# EAGLE board schematic-version2 - Jigbin (EAGLE 8.6.0)
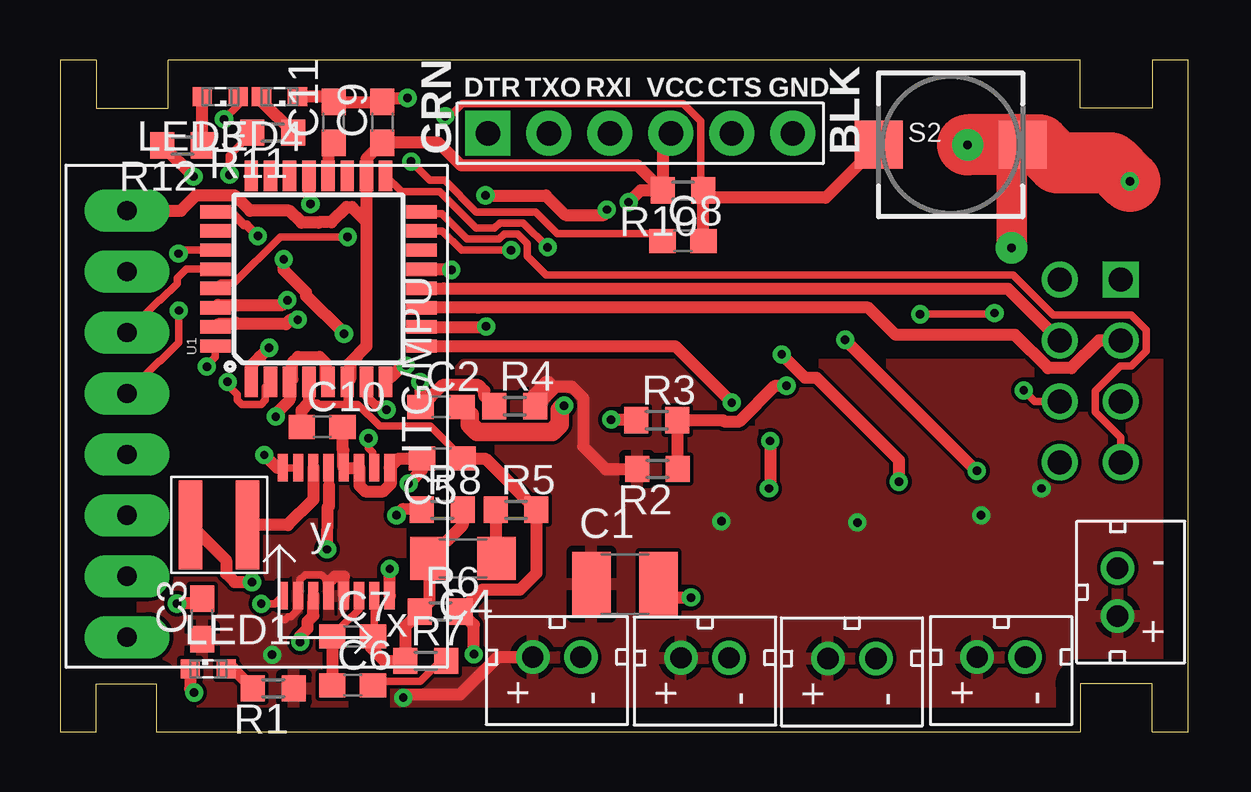
[diagram p0: board, top side]
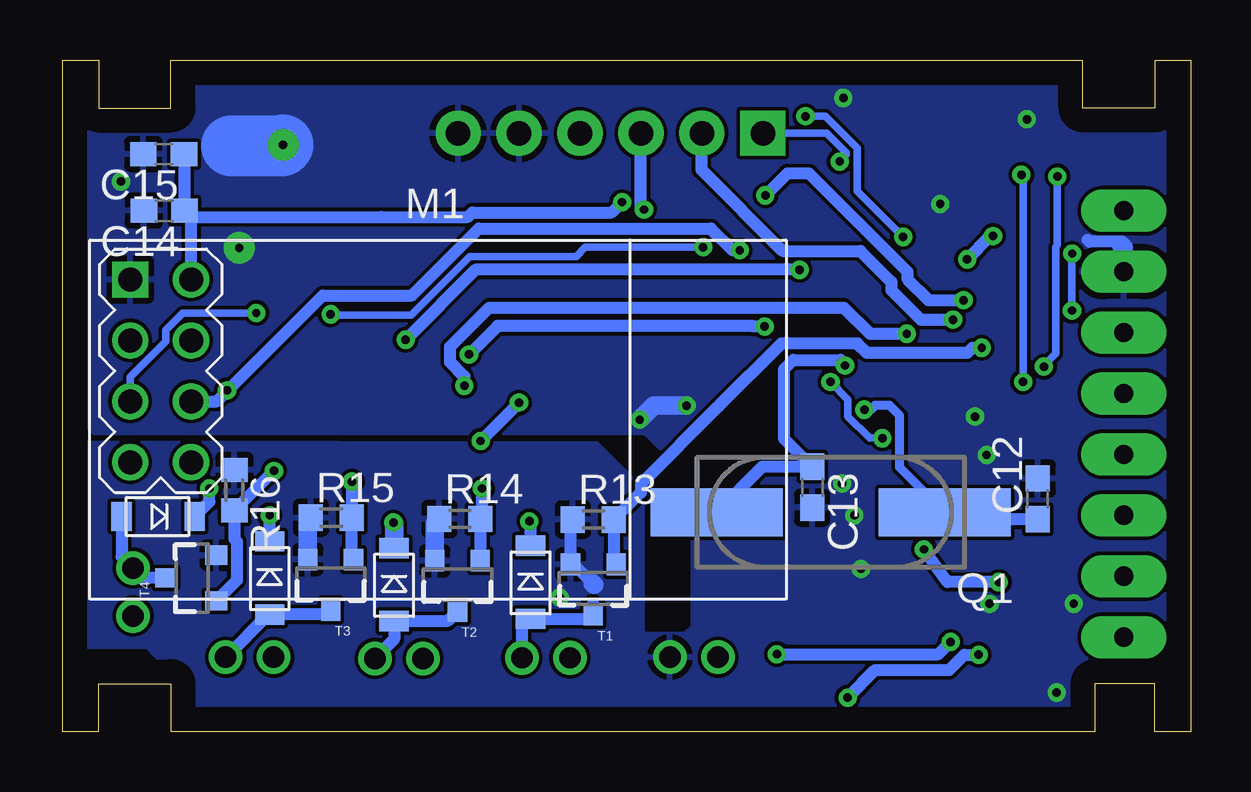
[diagram p1: board, bottom side, seen from below]

Size 47 x 28 mm. Coordinates in mm from the lower left corner, seen from the top.
Outline: 0,0 1.5,0 1.5,2 4,2 4,0 42.5,0 42.5,2 45.5,2 45.5,0 47,0 47,28 45.5,28 45.5,26 42.5,26 42.5,28 4.5,28 4.5,26 1.5,26 1.5,28 0,28 0,0
Copper layers (1*16): Top 0.035mm / dielectric 1.5mm / Bottom 0.035mm
Design rules "default": minimum track width 6mil, minimum drill 0.35mm, track to track 6mil, track to pad 6mil, pad to pad 6mil, via to via 6mil, smd to smd 6mil, copper to edge 40mil, drill to drill 6mil, minimum pad ring 10mil, minimum via ring 8mil, stop-mask expansion 4mil, vias tented up to drill 0mil, thermal gap 10mil

## Footprints (pad centres in the part's own frame; a part is rotated, then mirrored left to right if it is on the bottom)
C1210 = smd 1.6 x 2.7: 1 -1.4,0; 2 1.4,0
C0603 = smd 1.1 x 1: 1 -0.85,0; 2 0.85,0
C1206 = smd 1.6 x 1.8: 1 -1.4,0; 2 1.4,0
MINI2-F3-B = smd 1.22 x 0.85: NEG 0,1.55; POS 0,-1.5
FTDI_DEVICE_SIDE = drill 1.016 pad 1.88 square: P$1 -6.35,0 | drill 1.016 pad 1.88: P$2 -3.81,0; P$3 -1.27,0; P$4 1.27,0; P$5 3.81,0; P$6 6.35,0
XAL4020 = smd 0.98 x 3.7: 1 -1.185,0; 2 1.185,0
SML0603 = smd 0.8 x 0.8: A 0.75,0; C -0.75,0
WIRELESS-NRF24L01 = drill 1 square: 1 -12.7,6.35 | drill 1: 2 -10.16,6.35; 3 -12.7,3.81; 4 -10.16,3.81; 5 -12.7,1.27; 6 -10.16,1.27; 7 -12.7,-1.27; 8 -10.16,-1.27
CSM-7X-DU = smd 5.5 x 2: 1 -4.75,0; 2 4.75,0
R0603 = smd 1 x 1.1: 1 -0.85,0; 2 0.85,0
PUSHBUTTON_SMD_SJ = smd 2 x 2: P$1 3,0; P$2 -3,0
SOT23-3 = smd 0.8 x 0.9: 1 -0.95,-1; 2 0.95,-1; 3 0,1.1
TQFP32-08 = smd 1.27 x 0.559: 1 -4.293,2.8; 2 -4.293,2; 3 -4.293,1.2; 4 -4.293,0.4; 5 -4.293,-0.4; 6 -4.293,-1.2; 7 -4.293,-2; 8 -4.293,-2.8; 17 4.293,-2.8; 18 4.293,-2; 19 4.293,-1.2; 20 4.293,-0.4; 21 4.293,0.4; 22 4.293,1.2; 23 4.293,2; 24 4.293,2.8 | smd 0.559 x 1.27: 9 -2.8,-4.293; 10 -2,-4.293; 11 -1.2,-4.293; 12 -0.4,-4.293; 13 0.4,-4.293; 14 1.2,-4.293; 15 2,-4.293; 16 2.8,-4.293; 25 2.8,4.293; 26 2,4.293; 27 1.2,4.293; 28 0.4,4.293; 29 -0.4,4.293; 30 -1.2,4.293; 31 -2,4.293; 32 -2.8,4.293
GY-521 = drill 0.8 pad 1.778 long: ADO -8.89,-6.35; GND -8.89,6.35; INT -8.89,-8.89; SCL -8.89,3.81; SDA -8.89,1.27; VCC -8.89,8.89; XCL -8.89,-3.81; XDA -8.89,-1.27
JST_CONNECTOR_FEMALE = drill 0.889: + 0,1; - 0,-1
SSOP-16GN = smd 0.419 x 1.143: 1 -2.223,-2.667; 2 -1.587,-2.667; 3 -0.953,-2.667; 4 -0.318,-2.667; 5 0.318,-2.667; 6 0.953,-2.667; 7 1.587,-2.667; 8 2.223,-2.667; 9 2.223,2.667; 10 1.587,2.667; 11 0.953,2.667; 12 0.318,2.667; 13 -0.318,2.667; 14 -0.953,2.667; 15 -1.587,2.667; 16 -2.223,2.667

## Placement (x,y rotation side)
C1  100uF  [C1210]  23.55,6.15 0 top
C2  0.056uF  [C0603]  15.88,13.54 0 top
C3  10uF  [C0603]  5.92,4.7 90 top
C4  65pF  [C1206]  16.79,7.21 180 top
C5  22uF  [C0603]  15.93,11.38 180 top
C6  470pF  [C0603]  12.19,1.93 0 top
C7  10pF  [C0603]  12.19,3.96 0 top
C8  0.1uF  [C0603]  25.96,20.45 0 top
C9  0.1uF  [C0603]  13.44,25.4 90 top
C10  0.1uF  [C0603]  10.92,12.7 0 top
C11  0.1uF  [C0603]  11.4,25.4 90 top
C12  27pF  [C0603]  6.38,9.7 90 bottom
C13  27pF  [C0603]  15.77,10.19 270 bottom
C14  10uF  [C0603]  42.77,21.72 180 bottom
C15  0.1uF  [C0603]  42.8,24.08 180 bottom
D1  DB2W40300L  [MINI2-F3-B]  27.51,6.2 0 bottom
D2  DB2W40300L  [MINI2-F3-B]  33.2,6.1 0 bottom
D3  DB2W40300L  [MINI2-F3-B]  38.38,6.38 0 bottom
D4  DB2W40300L  [MINI2-F3-B]  43.05,8.97 270 bottom
J2  FTDI_DEVICE  [FTDI_DEVICE_SIDE]  24.18,24.94 0 top
L1  3.3uH  [XAL4020]  6.63,8.61 0 top
LED1  RED  [SML0603]  6.17,2.62 0 top
LED3  YELLOW  [SML0603]  6.68,26.47 180 top
LED4  YELLOW  [SML0603]  9.14,26.47 180 top
M1  WIRELESS-NRF24L01  [WIRELESS-NRF24L01]  31.5,12.5 0 bottom
Q1  8MHz  [CSM-7X-DU]  15.01,9.14 180 bottom
R1  820  [R0603]  8.89,1.8 180 top
R2  10K  [R0603]  24.89,10.95 180 top
R3  10K  [R0603]  24.87,12.98 0 top
R4  200K  [R0603]  18.95,13.56 0 top
R5  10K  [R0603]  19,9.25 0 top
R6  374K  [R0603]  15.85,5 0 top
R7  15K  [R0603]  15.24,2.95 0 top
R8  162K  [R0603]  15.93,9.25 0 top
R10  10K  [R0603]  25.96,22.56 180 top
R11  820  [R0603]  8.86,24.97 180 top
R12  820  [R0603]  5.11,24.43 180 top
R13  10K  [R0603]  24.89,8.84 0 bottom
R14  10K  [R0603]  30.45,8.86 0 bottom
R15  10K  [R0603]  35.81,8.92 0 bottom
R16  10K  [R0603]  39.85,10.06 270 bottom
S2  PUSH_BUTTON  [PUSHBUTTON_SMD_SJ]  37.11,24.46 0 top
T1  NMOS  [SOT23-3]  24.89,5.97 180 bottom
T2  NMOS  [SOT23-3]  30.56,6.12 180 bottom
T3  NMOS  [SOT23-3]  35.84,6.17 180 bottom
T4  NMOS  [SOT23-3]  41.61,6.4 90 bottom
U1  ATMEGA328P_TQFP  [TQFP32-08]  10.77,18.87 90 top
U2  GY-521MPU6050  [GY-521]  11.68,12.83 0 top
U$1  JST_CONNECTOR_FEMALE  [JST_CONNECTOR_FEMALE]  20.7,3.1 90 top
U$2  LTC3534  [SSOP-16GN]  11.51,8.33 180 top
U$4  JST_CONNECTOR_FEMALE  [JST_CONNECTOR_FEMALE]  26.87,3.07 90 top
U$7  JST_CONNECTOR_FEMALE  [JST_CONNECTOR_FEMALE]  32.99,3.05 90 top
U$10  JST_CONNECTOR_FEMALE  [JST_CONNECTOR_FEMALE]  39.22,3.1 90 top
U$13  JST_CONNECTOR_FEMALE  [JST_CONNECTOR_FEMALE]  44.07,5.82 180 top

## Library data of the parts
C1 C4 C8-C11 = rcl; SPICEPREFIX: C
C2 C3 C5-C7 C12-C15 R2-R8 R10 R13-R16 = resistor
D1-D4 J2 M1 U2 U$1 U$4 U$7 U$10 U$13 = quad
L1 = coilcraft
LED1 LED3 LED4 = led
Q1 = crystal; OC_FARNELL: unknown; OC_NEWARK: unknown
R1 R11 R12 = rcl; SPICEPREFIX: R
S2 = adafruit
T1-T4 = quad; DATASHEET: http://www.mouser.com/ds/2/196/irlml6244pbf-936666.pdf; MOUSER: 942-IRLML6244TRPBF; URL: http://www.mouser.com/Search/ProductDetail.aspx?R=IRLML6244TRPBFvirtualkey57370000virtualkey942-IRLML6244TRPBF
U1 = quad; PROD_ID: IC-09069
U$2 = LTC3534

## Nets
CE: M1.3 U1.11
CSN: M1.4 U1.12
DEBUG_LED1: R12.2 U1.32
DEBUG_LED2: R11.2 U1.2
DTR: C8.1 J2.P$1
GND: C1.2 C2.2 C3.2 C5.2 C9.2 C10.2 C11.2 C12.2 C13.2 C14.2 C15.2 J2.P$5 J2.P$6 LED1.C LED3.C LED4.C M1.1 R3.1 R8.1 R13.1 R14.1 R15.1 R16.1 S2.P$1 T1.2 T2.2 T3.2 T4.2 U1.3 U1.5 U1.21 U2.GND U$1.- U$2.1 U$2.3 U$2.4 U$2.7 U$2.8 U$2.9 U$2.16
MISO: M1.7 U1.16
MOSI: M1.6 U1.15
N$1: C12.1 Q1.1 U1.7
N$2: C8.2 R10.1 S2.P$2 U1.29
N$3: D1.POS T1.3 U$4.-
N$4: C13.1 Q1.2 U1.8
N$5: D2.POS T2.3 U$7.-
N$6: D3.POS T3.3 U$10.-
N$7: D4.POS T4.3 U$13.-
N$8: L1.1 U$2.5
N$9: L1.2 U$2.6
N$10: LED1.A R1.2
N$12: LED3.A R12.1
N$13: LED4.A R11.1
N$14: C4.1 R5.1
N$16: C2.1 R4.1 U$2.2
N$18: C4.2 C7.2 R6.1 R7.1 R8.2 U$2.15
N$19: C6.1 C7.1 U$2.14
N$20: C6.2 R7.2
N$25: C11.1 U1.20
PWM1: R13.2 T1.1 U1.1
PWM2: R14.2 T2.1 U1.9
PWM3: R15.2 T3.1 U1.10
PWM4: R16.2 T4.1 U1.13
PWR: C1.1 C3.1 D1.NEG D2.NEG D3.NEG D4.NEG R1.1 R2.2 R4.2 U$1.+ U$2.10 U$2.12 U$2.13 U$4.+ U$7.+ U$10.+ U$13.+
RXD: J2.P$3 U1.30
SCK: M1.5 U1.17
SCL: U1.28 U2.SCL
SDA: U1.27 U2.SDA
TXD: J2.P$2 U1.31
V_BAT: R2.1 R3.2 U1.25
V_REG_OUT: C5.1 C9.1 C10.1 C14.1 C15.1 J2.P$4 M1.2 R5.2 R6.2 R10.2 U1.4 U1.6 U1.18 U2.VCC U$2.11

## Tracks (layer width: path | path; a pad name or v marks a point on that pad's centre or on a via)
CE
  Top 0.508: M1.3 43.3,16.31 42.14,15.15 41.17,15.15 39.79,16.54 34.82,16.54 33.68,17.68 17.43,17.68 17.43,17.67 15.29,17.67 | 15.29,17.68 15.29,17.67 | 15.29,17.67 U1.11
CSN
  Top 0.508: U1.12 15.98,18.47 39.49,18.47 M1.4
DEBUG_LED1  (via drill 0.35)
  Top 0.305: U1.32 6.48,15.62 6.12,15.27 v6.12,15.21
  Top 0.508: v5.56,23.14 R12.2
  Bottom 0.305: v5.56,23.14 5.56,20.27 5.64,20.2 5.64,15.75 6.12,15.27 v6.12,15.21
DEBUG_LED2  (via drill 0.35)
  Top 0.305: U1.2 8.55,14.36 8.55,13.82 8.38,13.64 7.56,13.64 7.38,13.82 7.38,14.05 6.99,14.45 v6.99,14.58 | v7.06,23.22 7.06,24.02 R11.2
  Bottom 0.305: v6.99,14.58 6.99,21.54 6.99,23.14 v7.06,23.22
DTR  (via drill 0.35)
  Top 0.305: C8.1 24.8,20.75 20.73,20.75 19.82,21.66 17.35,21.66 16.03,22.99 15.41,22.99 v14.63,23.77
  Bottom 0.305: v14.63,23.77 14.35,24.04 14.35,24.13 15.16,24.94 J2.P$1
GND  (via drill 0.35, 0.35 pad 1.3)
  Top 0.305: U$2.9 8.95,5.33 v8.39,5.33 | LED3.C 7.43,26.12 v6.83,25.53 | U$2.8 U$2.7
  Top 0.508: U$2.8 9.04,11 v8.51,11.53 | C10.2 11.77,11.77 11.8,11.74 11.8,11.02 U$2.4 U$2.3 12.48,10.98 12.48,10.26 12.72,10.02 13.47,10.02 13.77,10.32 13.77,11 U$2.1 14.11,11.38 C5.2 15.08,10.91 v14.53,10.34 | R8.1 14.28,9.27 v14.02,9.02 | U$2.16 13.74,5.68 v13.74,6.78 | C3.2 5.7,5.33 v4.88,5.33 | LED1.C 5.42,1.79 v5.59,1.63 | R3.1 23.04,12.98 v22.96,13.01 | LED4.C 11.19,26.47 C11.2 C9.2 13.6,26.42 v14.48,26.42 | U1.21 10.37,22.03 v10.44,22 | v8.99,13.13 9.12,13.26 9.12,13.37 9.57,13.82 U1.3 9.68,14.69 9.68,15.38 9.92,15.62 10.82,15.62 11.05,15.38 11.05,14.69 U1.5 | C1.2 25.5,5.59 v26.29,5.59
  Top 0.762: v21.01,13.59 20.83,13.41 20.83,12.79 20.52,12.48 17.38,12.48 17.07,12.79 17.07,13.2 C2.2
  Top 1.27: S2.P$1 39.65,24 v39.65,20.17
  Top 1.524: S2.P$1 39.95,24.3
  Top 2.54: v37.82,24.46 S2.P$1 40.81,24.46 41.55,23.71 43.8,23.71 v44.58,22.94
  Bottom 0.508: R13.1 25.84,8.74 T1.2 25.71,6.97 24.92,6.17 | 2.92,20.3 3.05,20.42 4.22,20.42 4.31,20.51
  Bottom 0.762: T2.2 31.51,8.66 R14.1 | T3.2 36.79,8.79 R15.1 | 24.92,6.17 24.87,6.12 | U2.GND 2.79,20.17 2.92,20.3 | v21.01,13.59 22.38,13.59 v22.96,13.01
  Bottom 2.54: v37.82,24.46 37.87,24.41 39.98,24.41
  pour Bottom: 0.33,25.68 4.6,25.68 4.85,25.93 4.85,27.66 41.99,27.66 42.09,27.56 42.16,27.48 42.16,25.45 42.39,25.22 46.71,25.22 46.71,13.41 45.72,12.42 22.76,12.42 21.16,10.82 20.78,10.44 20.78,4.39 21.08,4.09 22.83,4.09 22.83,1.19 22.63,0.99 4.85,0.99 4.85,1.65 4.09,2.41 3.89,2.62 0.43,2.62 0.23,2.82 0.33,2.92
  pour Bottom: 24.74,12.04 22.81,10.11 22.81,0.86 41.4,0.86 41.4,1.4 43.21,3.2 43.51,3.51 46.69,3.51 46.69,11.96 46.46,11.96 46.35,12.06
MISO
  Top 0.305: U1.16 15.14,21.59 15.9,21.59 16.97,20.52 18.29,20.52 18.51,20.75 19.08,20.75 19.48,20.35 19.48,19.82 20.27,19.03 39.73,19.03 41.39,17.37 44.63,17.37 45.26,16.75 45.26,15.87 44.63,15.25 44.18,15.25 43.14,14.21 43.14,13.33 44.2,12.27 M1.7
MOSI  (via drill 0.35)
  Top 0.305: M1.6 40.62,13.77 v40.16,14.22 | U1.15 15.93,20.87 16.74,20.07 v18.8,20.07
  Bottom 0.508: v18.8,20.07 19.08,20.07 20,20.98 29.66,20.98 32.46,18.18 36.16,18.18 40.58,13.77 M1.6
N$1  (via drill 0.35)
  Top 0.381: v13.6,13.41 13.41,13.6 13.15,13.6 12.77,13.98 U1.7
  Bottom 0.381: Q1.1 12.13,11.01 12.13,13.18 12.55,13.6 13.15,13.6 13.34,13.41 v13.6,13.41
  Bottom 0.508: C12.1 9.97,8.85 Q1.1
N$2  (via drill 0.35)
  Top 0.305: C8.2 26.72,21.4 26.72,22.68 | U1.29 6.69,18.69 7.24,18.69 9.18,20.62 v11.98,20.62 | v16.05,25.65 16.23,25.65 16.77,26.19 25.97,26.19 26.7,25.46 26.7,22.67 R10.1
  Top 0.508: C8.2 R10.1 | 26.72,22.68 27.15,22.25 31.9,22.25 S2.P$2
  Bottom 0.305: v11.98,20.62 13.89,22.53 13.89,24.18 13.89,24.32 15.23,25.65 v16.05,25.65
N$3
  Bottom 0.508: U$4.- 27.87,4.33 D1.POS 25.06,4.7 T1.3 24.89,5.31 24.92,5.33
N$4  (via drill 0.35)
  Top 0.508: v14.41,15.26 14.3,15.26 U1.8
  Bottom 0.508: Q1.2 17.87,11.04 C13.1 16.94,12.2 16.94,15.11 16.56,15.49 14.59,15.49 v14.41,15.26
N$5
  Bottom 0.508: T2.3 30.98,4.6 D2.POS 33.2,3.85 U$7.-
N$6
  Bottom 0.508: T3.3 36.04,4.88 D3.POS 38.44,4.88 U$10.-
N$7
  Bottom 0.508: T4.3 43.65,6.4 U$13.- 44.55,7.3 D4.POS
N$8  (via drill 0.35)
  Top 0.305: 11.21,10.25 11.21,10.97 U$2.5 11.17,10.98
  Top 0.508: L1.1 6.92,7.14 6.92,6.59 7.28,6.23 v8,6.23 | v11.12,7.59 11.15,9.33 11.21,9.39 11.21,10.25
  Bottom 0.508: v8,6.23 10.14,6.23 v11.12,7.59
N$9
  Top 0.508: L1.2 9.5,8.61 10.55,9.66 U$2.6
N$10
  Top 0.508: R1.2 7.23,2.62 LED1.A
N$12
  Top 0.508: R12.1 5.93,24.46 LED3.A
N$13
  Top 0.508: R11.1 8.39,26.29 LED4.A
N$14
  Top 0.508: R5.1 18.15,7.25 C4.1
N$16  (via drill 0.35)
  Top 0.305: 15.87,14.5 15.93,14.45 | C2.1 14.86,13.7 | v12.85,12.23 12.85,11.82 13.04,11.63 13.04,11.05 U$2.2
  Top 0.508: R4.1 17.68,13.98 17.68,14.21 17.44,14.45 15.93,14.45 C2.1 15.03,14.59 v15.01,14.58
  Bottom 0.305: v15.01,14.58 14.28,13.85 14.28,13.13 13.38,12.23 v12.85,12.23
N$18
  Top 0.305: U$2.15 13.09,4.04 C7.2
  Top 0.508: 13.54,2.92 R7.1 14.39,4.39 R6.1 15.39,5.39 C4.2 16.78,8.6 R8.2 | 13.54,2.92 13.54,2.9 | 13.54,2.92 12.97,3.49 C7.2
N$19
  Top 0.305: C7.1 12.14,4.79 12.16,4.79 12.46,5.09 U$2.14
  Top 0.508: C7.1 C6.1
N$20
  Top 0.305: R7.2 15.87,2.95 15.02,2.09 13.2,2.09 C6.2
N$25
  Top 0.508: C11.1 11.17,24.32 U1.20
PWM1  (via drill 0.35)
  Top 0.508: 8.33,15.62 8.36,15.62 | U1.1 7.97,15.27 8.32,15.62 8.33,15.62 | v8.71,16 8.33,15.62
  Bottom 0.508: T1.1 24.04,7.07 R13.2 22.92,9.96 22.92,10.31 19.66,13.57 17.05,16.18 13.89,16.18 13.51,15.8 9.3,15.8 9.09,16 v8.71,16
PWM2  (via drill 0.35)
  Top 0.508: v29.59,12.12 29.59,10.19 v29.54,10.13 | v27.99,13.72 25.64,16.07 U1.9
  Bottom 0.508: T2.1 R14.2 29.54,8.93 v29.54,10.13 | v29.59,12.12 v27.99,13.72
PWM3  (via drill 0.35)
  Top 0.508: U1.10 17.74,16.87 v17.75,16.89 | v30.07,15.72 31.04,14.76 31.52,14.76 34.95,11.32 v34.95,10.41
  Bottom 0.508: v17.75,16.89 18.27,16.89 18.29,16.91 28.88,16.91 v30.07,15.72 | T3.1 34.96,7.25 R15.2 v34.95,10.41
PWM4  (via drill 0.35)
  Top 0.508: U1.13 16.16,19.27 16.18,19.25 v16.31,19.25 | v32.72,16.33 38.18,10.87 v38.2,10.87
  Bottom 0.508: v16.31,19.25 29.81,19.25 32.72,16.35 v32.72,16.33 | T4.1 39.75,6.31 39.75,7.92 39.85,8.02 R16.2 v38.2,10.87
PWR  (via drill 0.35)
  Top 0.305: 9.37,4.65 9.51,4.79 9.62,4.79 9.92,5.09 U$2.10 9.99,5.74 9.99,6.32 10.22,6.54 10.89,6.54 11.07,6.36 11.07,6.33 11.19,6.21 U$2.12
  Top 0.508: v14.3,1.41 14.42,1.53 16.66,1.53 18.23,3.1 U$1.+ | R4.2 19.87,13.56 20.68,14.38 21.33,14.38 21.79,13.91 21.79,11.89 22.73,10.95 R2.2 | U$2.13 11.82,6.44 11.84,6.45 11.43,6.45 11.19,6.21
  Top 0.762: R4.2 19.8,13.93 20.3,14.44
  Bottom 0.508: v14.3,1.41 13.14,2.56 10.07,2.56 9.43,3.2 v8.84,3.2 | D1.NEG 27.51,8.71 v27.56,8.76 | D3.NEG v38.38,9.02 | D4.NEG 40.89,9.57 v40.89,10.13
  Bottom 0.762: D2.NEG 33.2,8.69 v33.22,8.71
  pour Top: 46.51,15.29 16.84,15.29 13.59,12.04 2.62,12.04 1.8,11.23 1.8,4.78 4.39,2.18 4.85,1.73 4.85,0.46 41.43,0.46 41.91,0.94 42.06,1.09 42.06,2.95 42.09,2.97 46.05,2.97 46.05,14.76 46.51,15.21
  pour Top: 9.91,6.38 3.4,6.38 3.25,6.22 3.25,3.02 3.58,2.69 4.75,1.52 4.75,1.3 4.93,1.12 4.93,0.69 5.28,0.33 11.94,0.33 11.94,5.54 11.63,5.84 11.07,6.4 9.75,6.4
RXD  (via drill 0.35)
  Top 0.508: U1.30 6.59,17.79 9.28,17.79 v9.47,17.98 | v17.73,22.35 20.24,22.35 21.06,21.54 22.66,21.54 22.78,21.67 v22.78,21.76
  Bottom 0.508: v9.47,17.98 10.92,17.98 11.81,18.87 11.81,19.18 15.9,23.27 16.82,23.27 v17.73,22.35 | v22.78,21.76 22.91,21.89 J2.P$3
SCK  (via drill 0.35)
  Top 0.305: v35.84,17.4 38.89,17.4 v38.94,17.45 | v20.32,20.19 19.31,21.21 18.32,21.21 18.1,20.98 17.35,20.98 15.82,22.5 14.23,22.5 U1.17
  Bottom 0.305: M1.5 44.2,14.78 42.72,16.26 42.72,16.75 42.01,17.45 v38.94,17.45 | v35.84,17.4 35.81,17.37 32.49,17.37 30.04,19.81 25.6,19.81 25.22,20.19 v20.32,20.19
SCL
  Top 0.305: U2.SCL 4.14,17.98 4.18,17.98 4.88,18.68 4.88,18.9 5.25,19.27 U1.28
SDA  (via drill 0.35)
  Top 0.305: U2.SDA 4.14,15.44 4.18,15.44 4.95,16.22 v4.95,17.55 | v4.94,19.93 5.08,20.07 U1.27
  Bottom 0.305: v4.95,17.55 4.95,19.91 v4.94,19.93
TXD  (via drill 0.35)
  Top 0.508: 7.34,17.04 7.28,16.99 | 7.28,16.99 6.59,16.99 U1.31 | v9.91,17.17 9.6,17.17 9.41,16.99 7.28,16.99
  Bottom 0.508: J2.P$2 20.4,23.42 17.02,20.04 13.76,20.04 12.47,18.75 12.47,18.4 11.25,17.17 11.08,17.17 v9.91,17.17
V_BAT  (via drill 0.35)
  Top 0.305: 25.72,10.97 R2.1
  Top 0.381: v8.24,20.66 7.79,21.12 7.67,21.12 7.12,21.67 U1.25
  Top 0.508: R2.1 25.74,12.95 R3.2 27.62,12.98 27.67,12.93 28.32,12.93 29.8,14.42 v30.27,14.42 | v11.84,16.59 10.26,18.16 10.26,18.31 9.32,19.25 v9.32,19.68
  Bottom 0.508: v11.84,16.59 13.37,16.59 14.46,17.68 29.23,17.68 30.86,16.05 30.86,15.4 30.27,14.81 v30.27,14.42 | v9.32,19.68 8.35,20.66 v8.24,20.66
V_REG_OUT  (via drill 0.35)
  Top 0.305: C5.1 15.42,12.73 13.89,12.73 13.88,12.73 13.32,12.73 12.41,13.64 11.99,13.64 | 10.37,13.69 10.71,13.69 10.76,13.64 11.99,13.64 | U1.6 11.97,13.66 11.99,13.64
  Top 0.508: 10.55,4.82 10.31,4.58 10.31,4.29 10.01,3.99 v10.01,3.73 | v17.25,3.23 17.25,4.46 R6.2 17.6,5.91 19.16,5.91 19.85,6.6 R5.2 17.72,11.38 C5.1 | U1.4 10.37,13.69 10.07,13.39 C10.1 | U1.6 12.08,14.69 12.08,15.38 12.77,16.07 12.77,21.26 | 12.77,21.61 U1.18 12.77,23.88 C9.1 15.77,24.55 16.72,23.6 24.07,23.6 R10.2 | 12.77,21.61 12.77,21.26 | 12.67,21.72 12.77,21.61 | U2.VCC 5.03,21.72 5.67,22.36 7.28,22.36 7.92,21.72 9.56,21.72 10.06,21.21 10.76,21.21 10.79,21.24 11.31,21.24 11.94,21.87 12.16,21.87 12.77,21.26 | 10.55,4.82 10.55,5.37 | 10.55,5.37 10.54,5.38 10.54,4.84 10.55,4.82 | U$2.11 10.55,5.37 | J2.P$4 25.11,24.6 R10.2 | R10.2 24.18,22.55 v23.7,22.07
  Bottom 0.508: M1.2 41.66,21.45 | 41.66,21.45 C14.1 41.95,21.74 C15.1 | 41.66,21.45 33.72,21.45 30.13,21.45 29.94,21.64 24.13,21.64 v23.7,22.07 | v10.01,3.73 10.52,3.23 v17.25,3.23